# Altium PCB IMX290_module_pcb.PcbDoc
Units mm, origin at the board's own origin, x right, y up, seen from the top; angles counter-clockwise.
Board outline 27 x 27 mm, 6 copper layers (Top Layer, GND_T, PWR, Singal_Int, GND_B, Bottom Layer), stack 0.816 mm thick; 52 components, 35 nets, 341 pads, 255 vias.
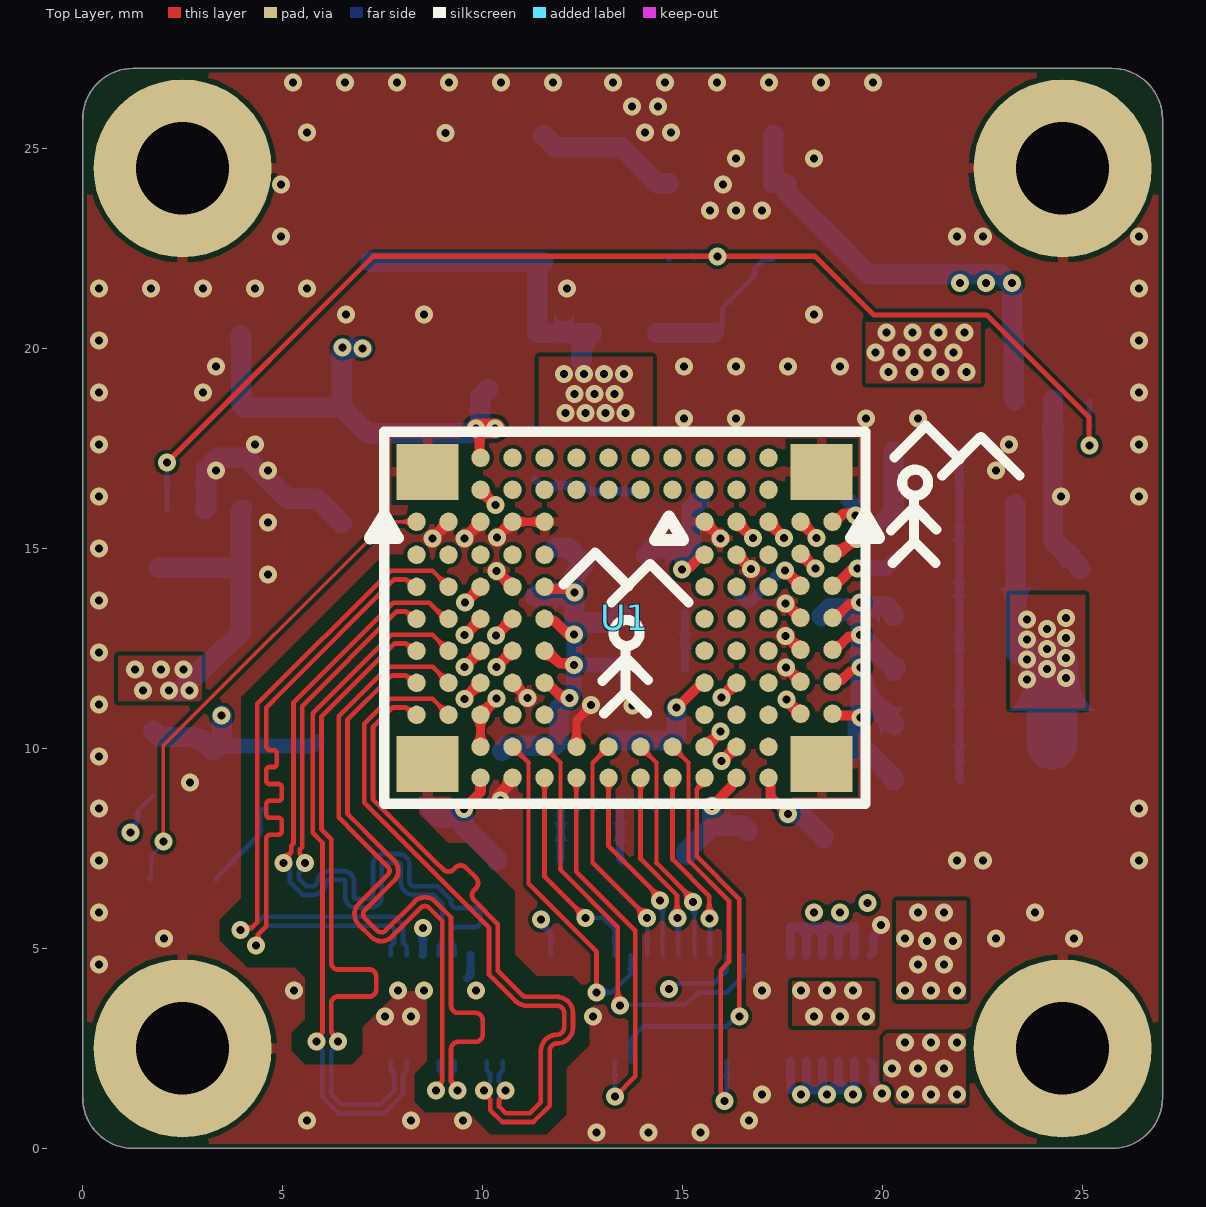
[diagram p0: Top Layer view]
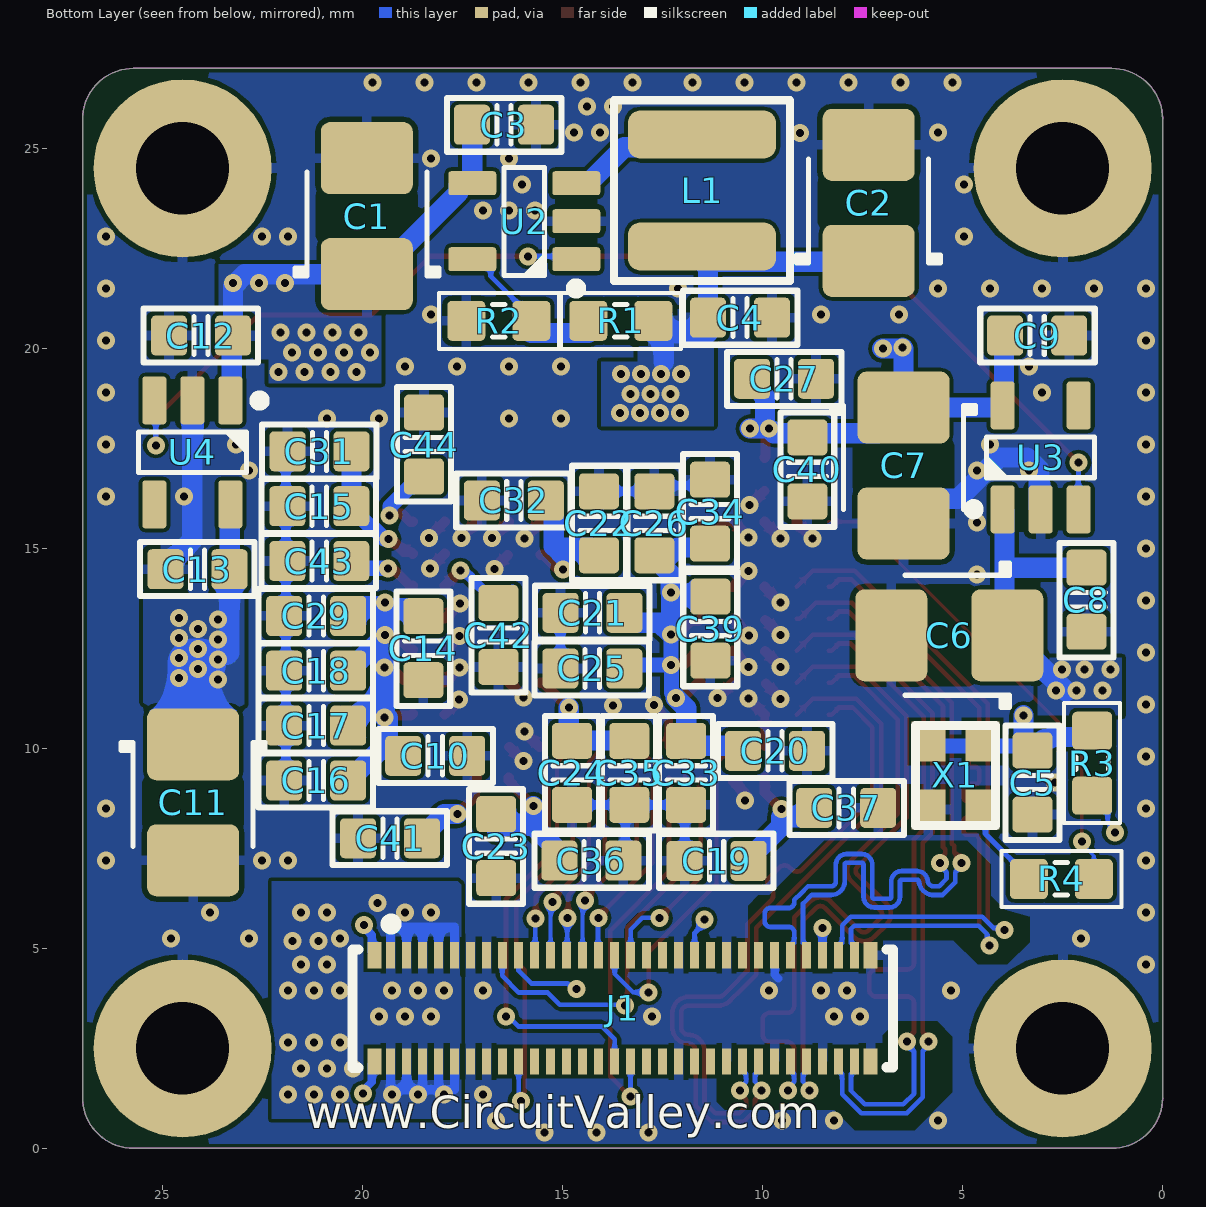
[diagram p1: Bottom Layer view, seen from below]
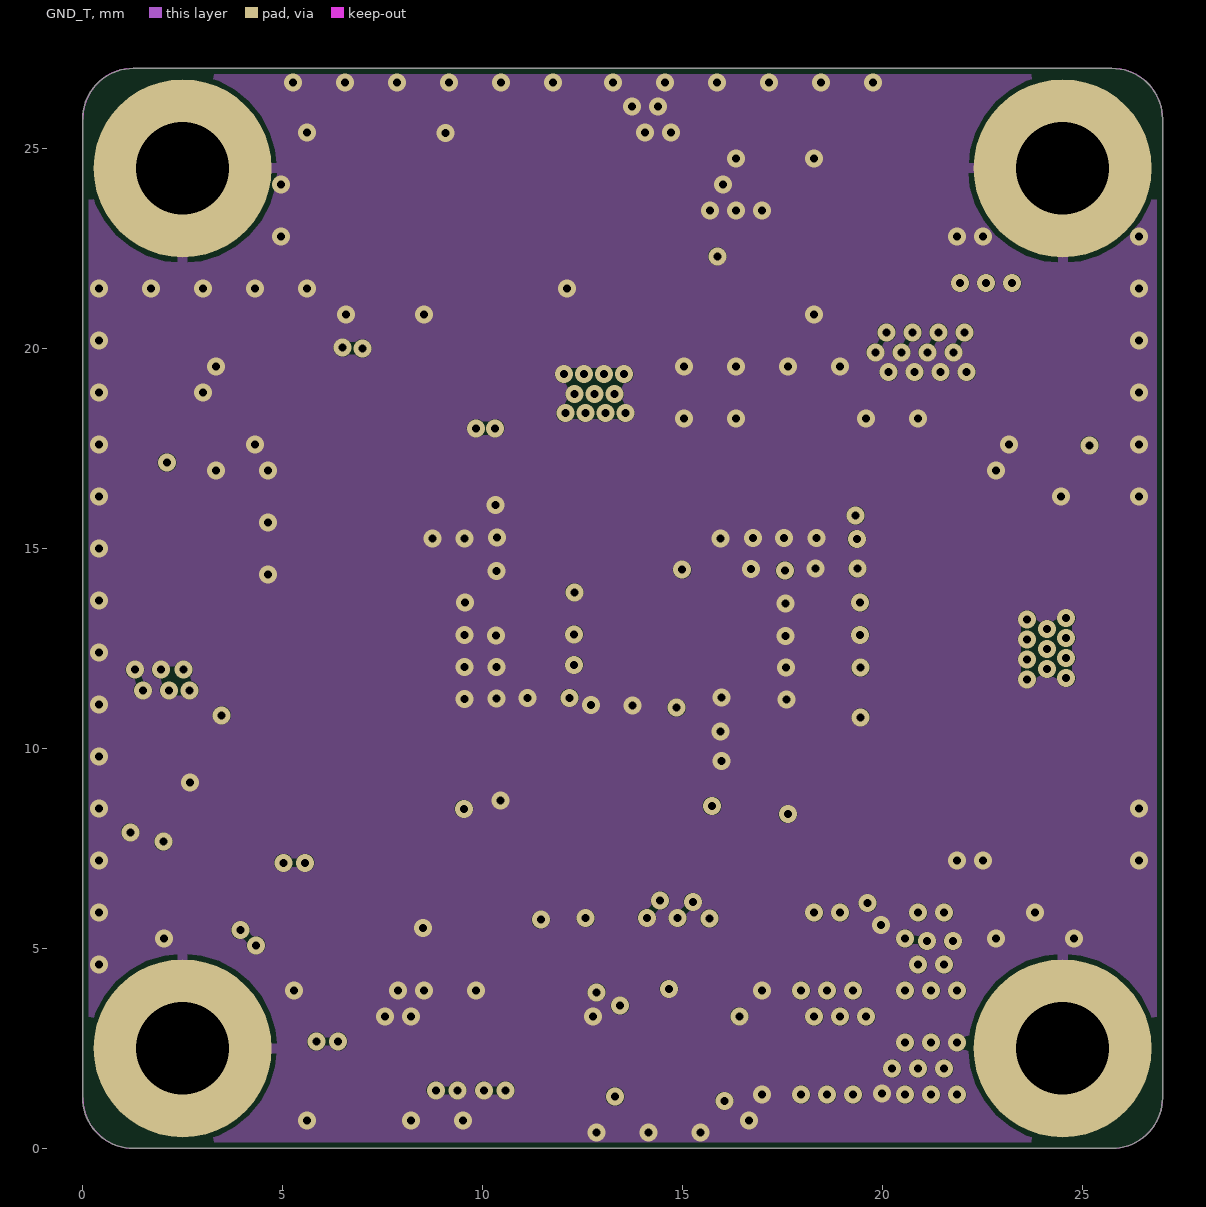
[diagram p2: GND_T]
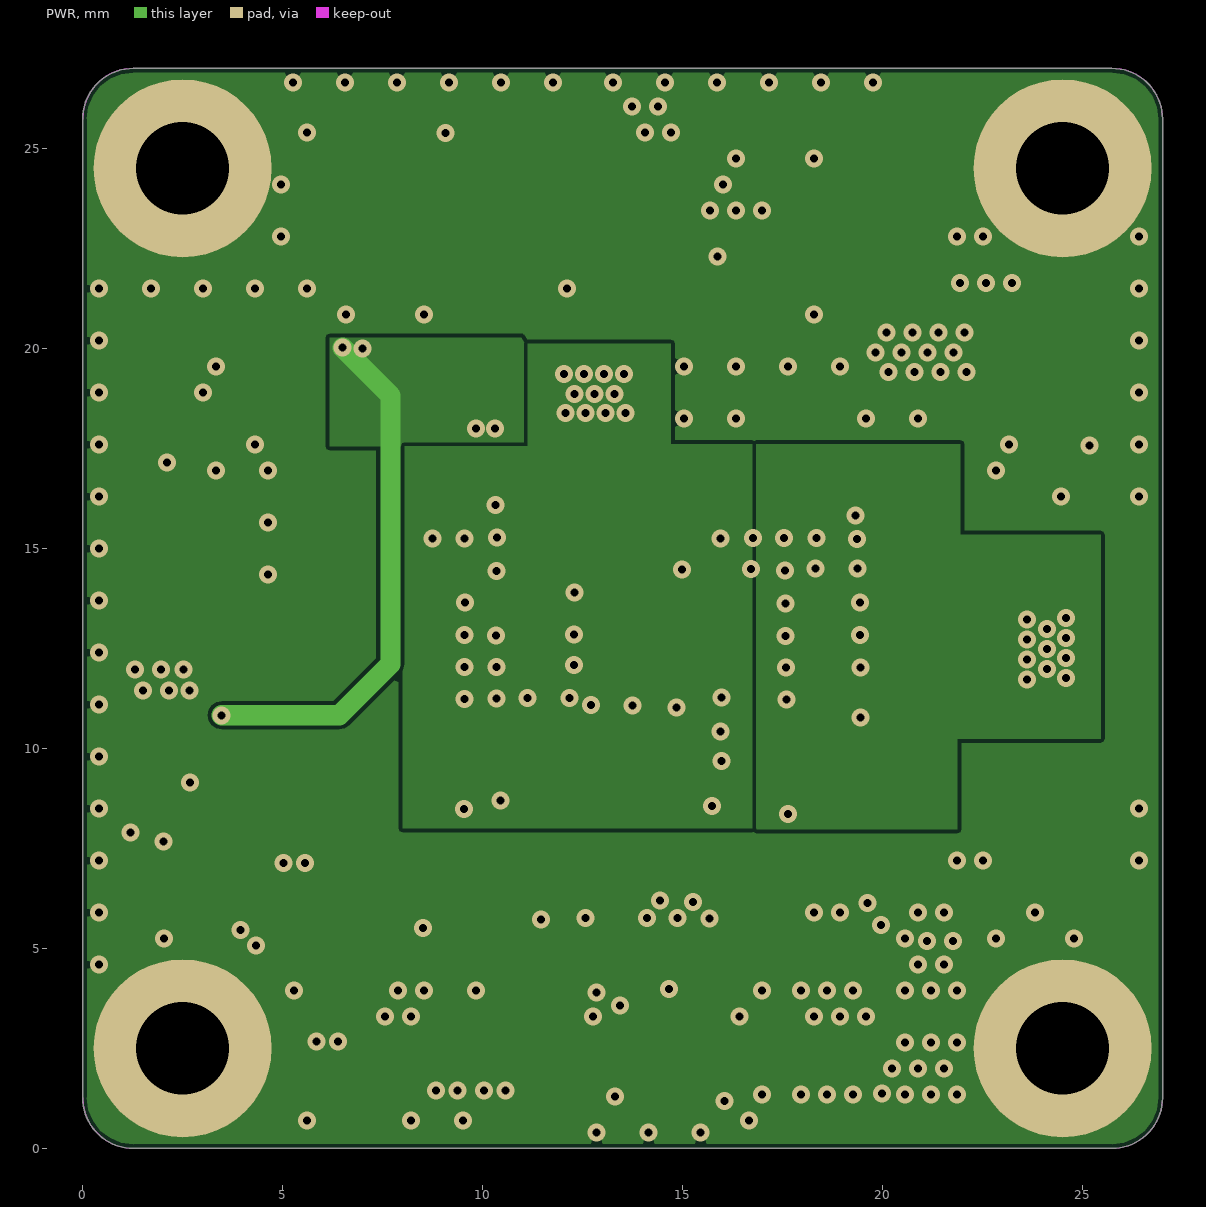
[diagram p3: PWR]
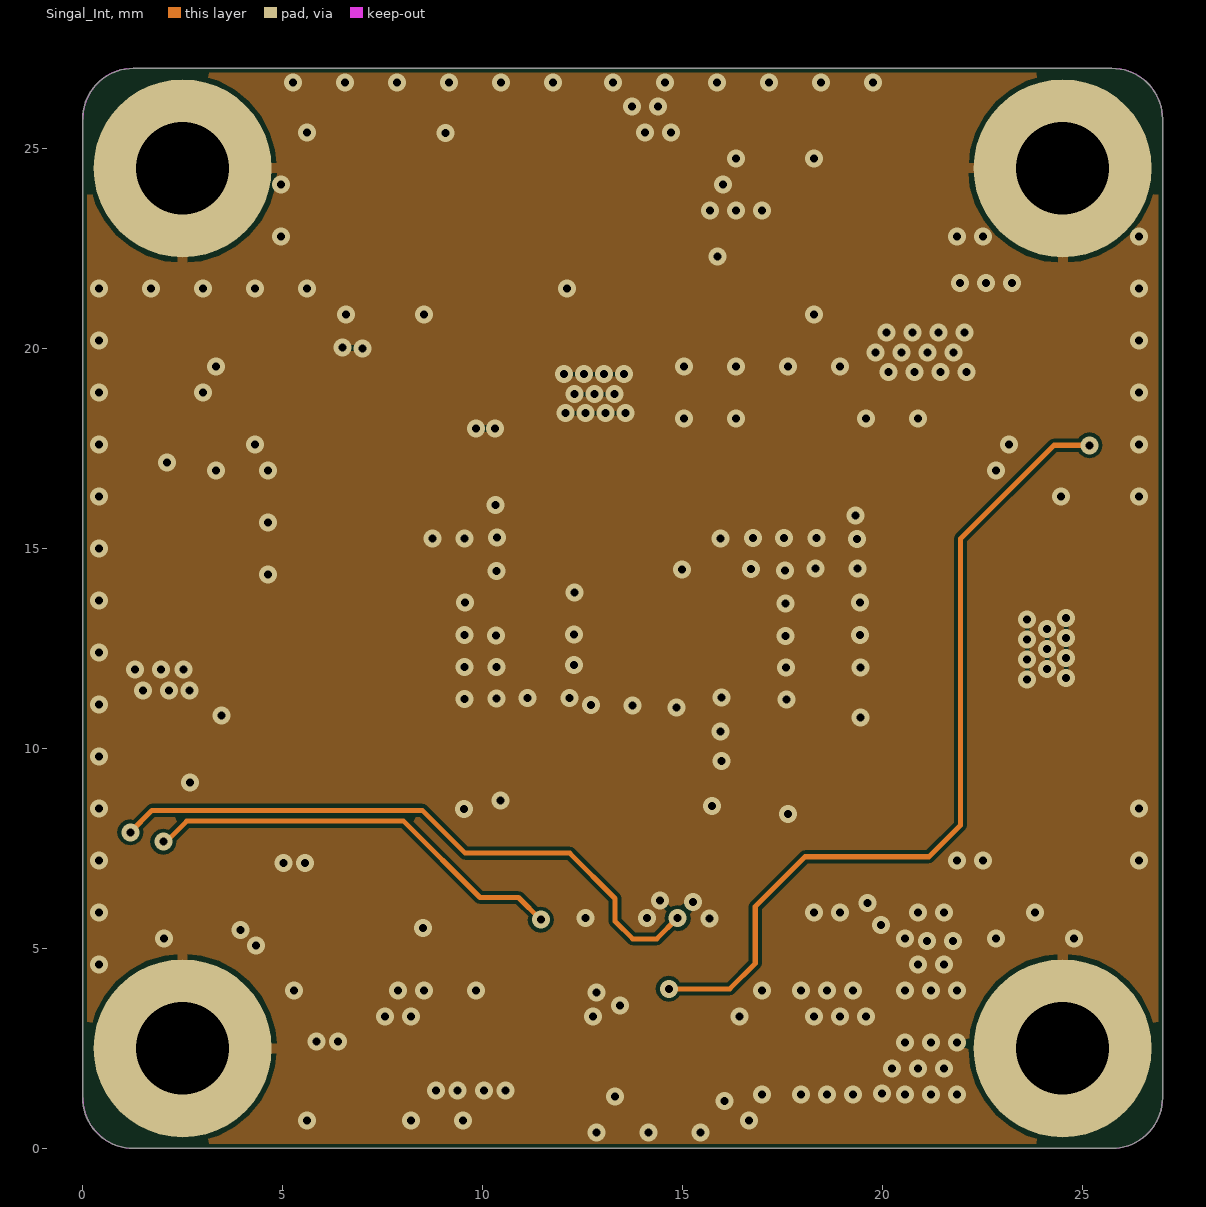
[diagram p4: Singal_Int]
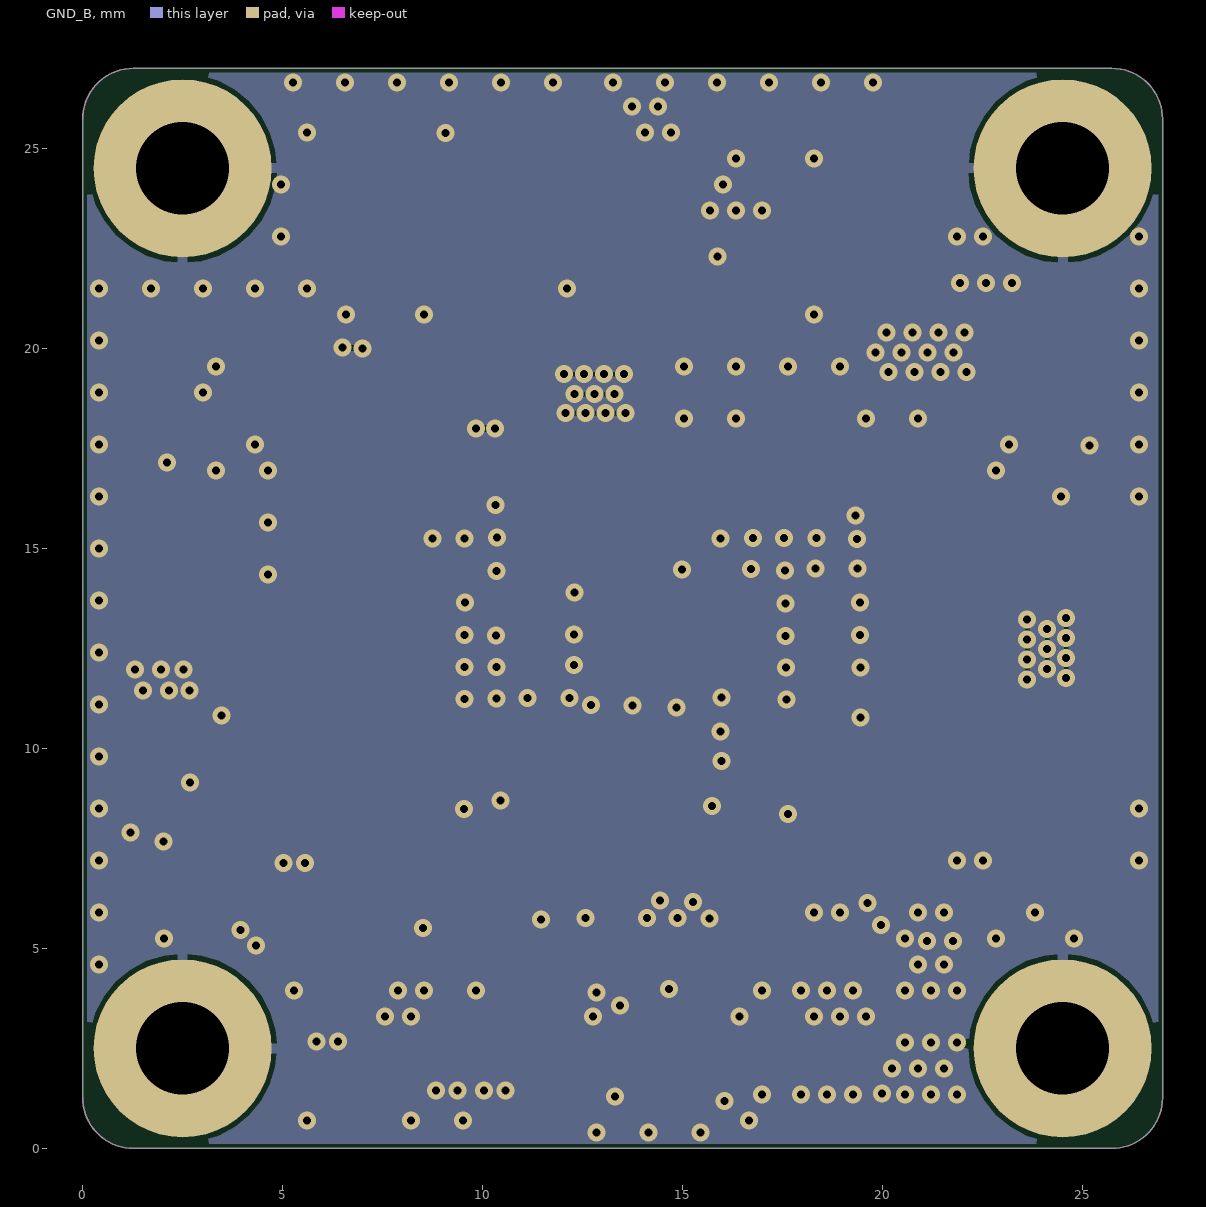
[diagram p5: GND_B]
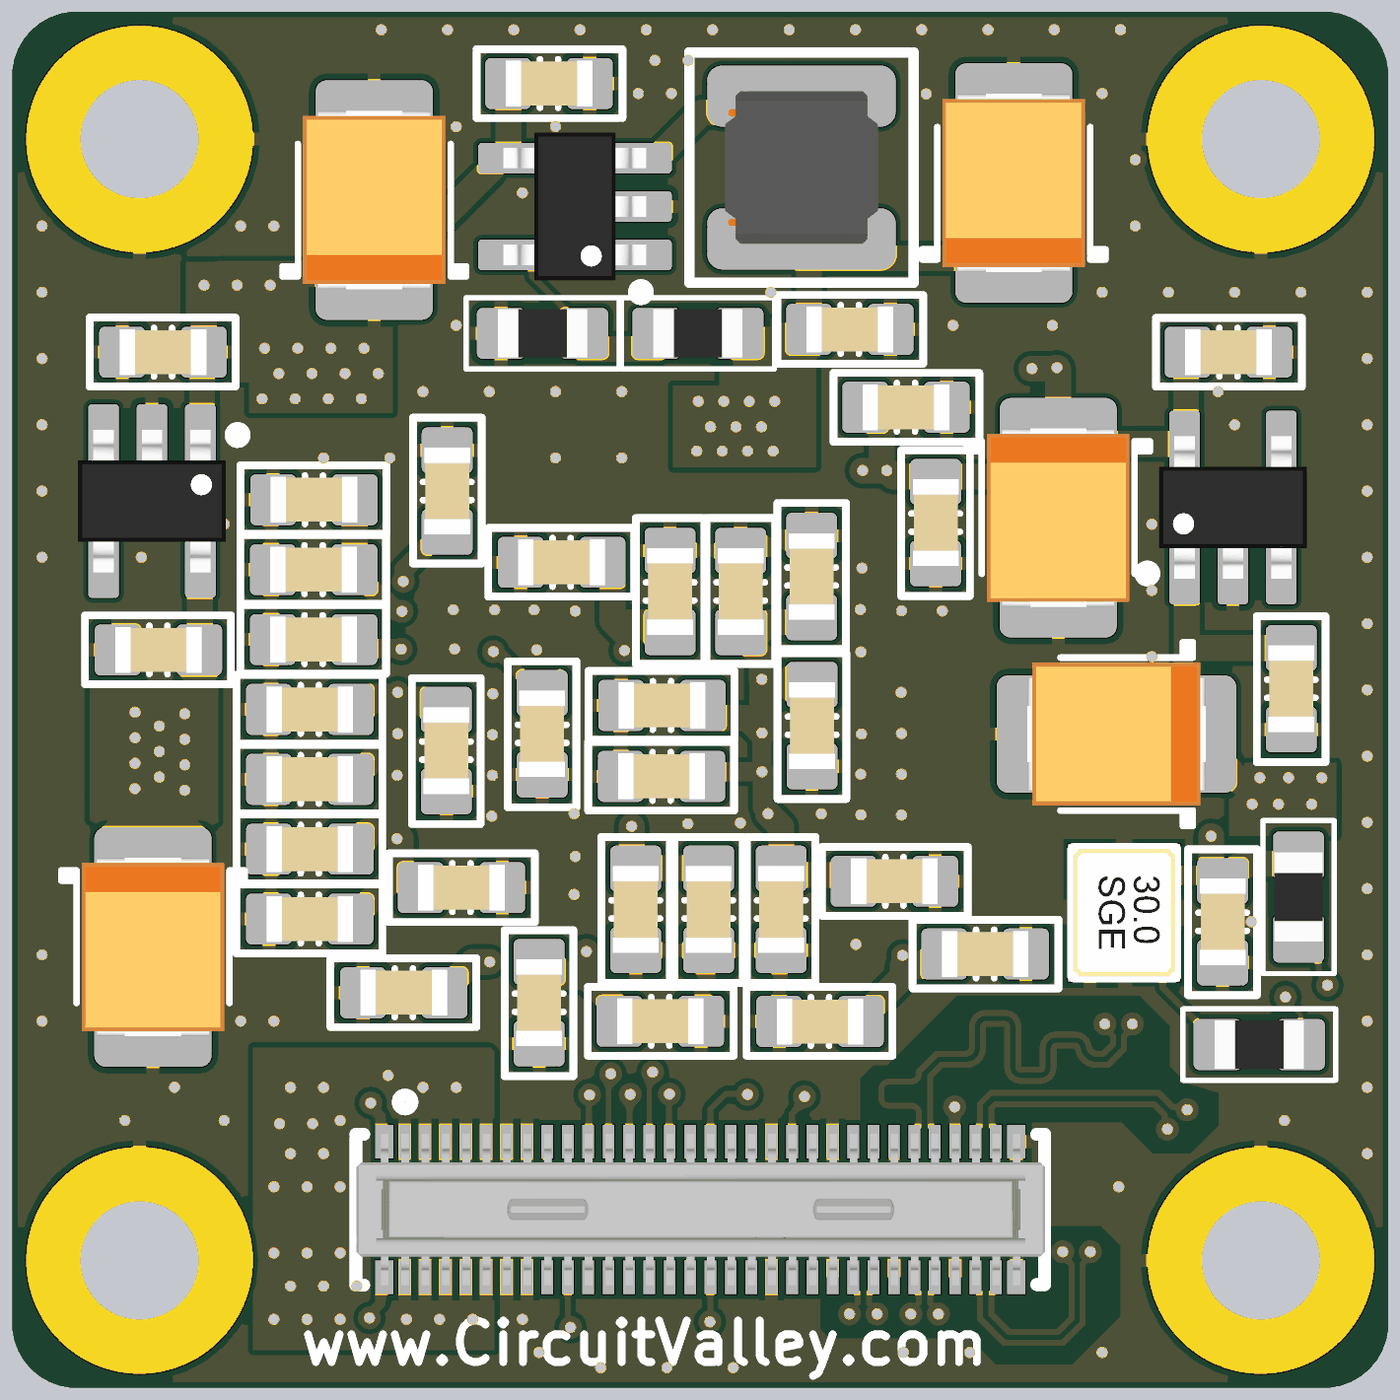
[diagram p6: 3D render of the assembled board from below, using the file's embedded part models]

## Layer stack, top to bottom
Top Solder: solder mask 0.0102, Solder Resist, Dk 3.5
Top Layer: signal copper 0.0356
Dielectric 2: prepreg 0.0711, PP-006, Dk 4.1
GND_T: signal copper 0.035
Dielectric 4: prepreg 0.0711, PP-006, Dk 4.1
PWR: signal copper 0.035
Dielectric 1: dielectric 0.32, FR-4, Dk 4.8
Singal_Int: signal copper 0.035
Dielectric 5: prepreg 0.0711, PP-006, Dk 4.1
GND_B: signal copper 0.035
Dielectric 3: prepreg 0.0711, PP-006, Dk 4.1
Bottom Layer: signal copper 0.0356
Bottom Solder: solder mask 0.0102, Solder Resist, Dk 3.5

## Board outline
0,1.27 0,25.73 cw(c1.27,25.73) 1.27,27 25.73,27 cw(c25.73,25.73) 27,25.73 27,1.27 cw(c25.73,1.27) 25.73,0 1.27,0 cw(c1.27,1.27)

## Design rules (kind name [scope] priority, off if disabled: settings)
Clearance Clearance_GNDT [OnLayer('GND_T')] p1: gap=0.127 ignorepadtopadclearanceinfootprint=FALSE
Clearance Clearance_INT [OnLayer('Signal_INT')] p2: gap=0.127 ignorepadtopadclearanceinfootprint=FALSE
Clearance [All] p3: gap=0.091 ignorepadtopadclearanceinfootprint=FALSE
Clearance Clearance_PWR [OnLayer('PWR')] p4: gap=0.127 ignorepadtopadclearanceinfootprint=FALSE
Clearance Clearance_GNDB [OnLayer('GND_B')] p5: gap=0.127 ignorepadtopadclearanceinfootprint=FALSE
ComponentClearance [All] p1: gap=0.254 collisioncheckmode=3 verticalgap=0 showdistances=FALSE
DiffPairsRouting [All] p1: maxlimit=0.102 minlimit=0.102 mostfreqgap=0.102 toplayer_minwidth=0.089 toplayer_maxwidth=0.254 toplayer_prefwidth=0.117 midlayer1_minwidth=0.117 midlayer1_maxwidth=0.254 midlayer1_prefwidth=0.117 midlayer2_minwidth=0.117 midlayer2_maxwidth=0.254 midlayer2_prefwidth=0.117 midlayer3_minwidth=0.117 midlayer3_maxwidth=0.254 midlayer3_prefwidth=0.117 midlayer4_minwidth=0.117 midlayer4_maxwidth=0.254 midlayer4_prefwidth=0.117 bottomlayer_minwidth=0.102 bottomlayer_maxwidth=0.254 bottomlayer_prefwidth=0.117 maxuncoupledlength=12.7
HoleSize [All] p1: absolutevalues=TRUE maxlimit=5 minlimit=0.025 maxpercent=80.000 minpercent=20.000
MatchedLengths Matched_MIPI_GRP [InNetClass('MIPI')] p1: tolerance=0.127 checknetsindiffpair=FALSE checkdiffpairvsdiffpair=TRUE checkxsignals=TRUE checkothers=TRUE
MatchedLengths Matched_MIPI [InNetClass('MIPI')] p2: tolerance=0.127 checknetsindiffpair=TRUE checkdiffpairvsdiffpair=FALSE checkxsignals=FALSE checkothers=FALSE
MatchedLengths Matched_GPIF_GRP [InNetClass('GPIF')] p3: tolerance=1.27 checknetsindiffpair=FALSE checkdiffpairvsdiffpair=TRUE checkxsignals=TRUE checkothers=TRUE
MatchedLengths Matched_USB3FX_GRP [InNetClass('USB3FX')] p4: tolerance=0.127 checknetsindiffpair=FALSE checkdiffpairvsdiffpair=TRUE checkxsignals=TRUE checkothers=TRUE
MatchedLengths Match_USB3FX [InNetClass('USB3FX')] p5: tolerance=0.102 checknetsindiffpair=TRUE checkdiffpairvsdiffpair=FALSE checkxsignals=FALSE checkothers=FALSE
MatchedLengths Matched_USB3_GRP [InNetClass('USB3')] p6: tolerance=0.254 checknetsindiffpair=FALSE checkdiffpairvsdiffpair=TRUE checkxsignals=TRUE checkothers=TRUE
MatchedLengths Matched_USB2 [InNetClass('USB2')] p7: tolerance=1.016 checknetsindiffpair=TRUE checkdiffpairvsdiffpair=FALSE checkxsignals=FALSE checkothers=FALSE
MatchedLengths Matched_USB3 [InNetClass('USB3')] p8: tolerance=0.102 checknetsindiffpair=TRUE checkdiffpairvsdiffpair=FALSE checkxsignals=FALSE checkothers=FALSE
MinimumSolderMaskSliver [All] p1: minsoldermaskwidth=0.001
PlaneClearance [All] p1: clearance=0.152
PlaneConnect PlaneConnect_1 [All] p1: pad.planeconnectstyle=Relief pad.reliefexpansion=0.508 pad.reliefentries=4 pad.reliefconductorwidth=0.254 pad.reliefairgap=0.127 via.planeconnectstyle=Direct via.reliefexpansion=0.508 via.reliefentries=4 via.reliefconductorwidth=0.254 via.reliefairgap=0.254
PolygonConnect [All] p1: thpad.connectstyle=Relief thpad.reliefconductorwidth=0.254 thpad.reliefentries=4 thpad.polygonreliefangle="90 Angle" thpad.airgapwidth=0.127 smdpad.connectstyle=Relief smdpad.reliefconductorwidth=0.254 smdpad.reliefentries=4 smdpad.polygonreliefangle="90 Angle" smdpad.airgapwidth=0.127 via.connectstyle=Direct via.reliefconductorwidth=0.254 via.reliefentries=4 via.polygonreliefangle="90 Angle" via.airgapwidth=0.254
RoutingVias [All] p1: holewidth=0.2 width=0.45 viastyle="Through Hole" minholewidth=0.2 minwidth=0.45 maxholewidth=6.3 maxwidth=7
SilkToSilkClearance [All] p1: silktosilkclearance=0
SilkToSolderMaskClearance [IsPad] p1: minsilkscreentomaskgap=0 clearancetoexposedcopper=TRUE
SolderMaskExpansion [All] p1: expansion=0.025 istentingtop=FALSE
Width [All] p1: maxlimit=1.27 minlimit=0.089 preferedwidth=0.127 midlayer1_minwidth=0.127 midlayer2_minwidth=0.127 midlayer3_minwidth=0.127 midlayer4_minwidth=0.127 minimp=50.000000 maximp=50.000000 favimp=50.000000
22 further rules are at their usual default settings.

## Classes and differential pairs
net class MIPI: CAM_CLK_N CAM_CLK_P CAM_D1_N CAM_D1_P CAM_D2_N CAM_D2_P CAM_D3_N CAM_D3_P CAM_D4_N CAM_D4_P
differential pair CAM_D4: +CAM_D4_P -CAM_D4_N
differential pair CAM_D3: +CAM_D3_P -CAM_D3_N
differential pair CAM_D2: +CAM_D2_P -CAM_D2_N
differential pair CAM_D1: +CAM_D1_P -CAM_D1_N
differential pair CAM_CLK: +CAM_CLK_P -CAM_CLK_N

## Components (designator, comment, footprint, x,y, rotation, side; value= is the part's Value field where it differs from the comment)
C1 "10µ" CAPMP3528X210N 19.896,23.305 r90 bottom
C2 "10µ" CAPMP3528X210N 7.348,23.637 r90 bottom
C3 "100n" CAPC1608N 16.467,25.591 r0 bottom
C4 "100n" CAPC1608N 10.566,20.768 r0 bottom
C5 "100n" CAPC1608N 3.252,9.145 r90 bottom
C6 "10µ" CAPMP3528X210N 5.334,12.827 r0 bottom
C7 "10µ" CAPMP3528X210N 6.477,17.071 r270 bottom
C8 "100n" CAPC1608N 1.905,13.716 r90 bottom
C9 "100n" CAPC1608N 3.137,20.32 r0 bottom
C10 "4.7uf" CAPC1608N 18.185,9.814 r0 bottom
C11 "10µ" CAPMP3528X210N 24.238,8.65 r270 bottom
C12 "100n" CAPC1608N 24.041,20.32 r180 bottom
C13 "100n" CAPC1608N 24.13,14.478 r180 bottom
C14 "100n" CAPC1608N 18.481,12.503 r90 bottom
C15 "100n" CAPC1608N 21.084,16.053 r180 bottom
C16 "100n" CAPC1608N 21.161,9.198 r180 bottom
C17 "100n" CAPC1608N 21.161,10.569 r180 bottom
C18 "100n" CAPC1608N 21.161,11.94 r180 bottom
C19 "100n" CAPC1608N 11.151,7.188 r180 bottom
C20 "100n" CAPC1608N 9.691,9.938 r0 bottom
C21 "100n" CAPC1608N 14.252,13.388 r180 bottom
C22 "100n" CAPC1608N 14.092,15.625 r270 bottom
C23 "100n" CAPC1608N 16.66,7.556 r90 bottom
C24 "100n" CAPC1608N 14.765,9.388 r90 bottom
C25 "100n" CAPC1608N 14.258,11.997 r180 bottom
C26 "100n" CAPC1608N 12.706,15.625 r270 bottom
C27 "10n" CAPC1608N 9.465,19.239 r0 bottom
C29 "4.7uf" CAPC1608N 21.161,13.311 r180 bottom
C31 "4.7uf" CAPC1608N 21.079,17.423 r180 bottom
C32 "4.7uf" CAPC1608N 16.22,16.196 r180 bottom
C33 "4.7uf" CAPC1608N 11.911,9.388 r90 bottom
C34 "4.7uf" CAPC1608N 11.315,15.918 r270 bottom
C35 "4.7uf" CAPC1608N 13.334,9.388 r90 bottom
C36 "4.7uf" CAPC1608N 14.283,7.192 r0 bottom
C37 "4.7uf" CAPC1608N 7.91,8.512 r0 bottom
C39 "4.7uf" CAPC1608N 11.307,12.993 r90 bottom
C40 "4.7uf" CAPC1608N 8.881,16.975 r90 bottom
C41 "0.22uf" CAPC1608N 19.316,7.751 r180 bottom
C42 "1uf" CAPC1608N 16.601,12.832 r90 bottom
C43 "1uf" CAPC1608N 21.084,14.682 r180 bottom
C44 "1uf" CAPC1608N 18.465,17.594 r270 bottom
J1 "DF40C-60DP-0.4V(51)" DF40C-60DP-0.4V 13.5,3.5 r180 bottom locked
L1 "2u2" TAIYO_NRS4018T2R2MDGJ 11.514,23.943 r270 bottom
R1 "Thick Film" RESC1608N_ZERO 13.546,20.688 r0 bottom value=30K
R2 "Thick Film" RESC1608N_ZERO 16.594,20.688 r0 bottom value=27K
R3 "Thick Film" RESC1608N_ZERO 1.761,9.629 r270 bottom value=0R
R4 "Thick Film" RESC1608N_ZERO 2.533,6.735 r0 bottom value=0R
U1 "IMX290LQR-C" IMX290LQR-C 13.549,13.265 r180 top locked
U2 "AP3417C" SOT23-5 15.959,23.178 r0 bottom
U3 "MIC550x" SOT23-5 3.048,17.272 r90 bottom
U4 "MIC550x" SOT23-5 24.257,17.399 r270 bottom
X1 "DSO221SR" "Active Oscillator 2520" 5.182,9.322 r270 bottom

## Footprints (in the part's own frame and the unit in brackets; to place one, negate y for a bottom-side part, rotate by r counter-clockwise, add the part's x,y. Pads: shape width x height; smd on the part's side, far side on the other; paste and mask are expansions set on the pad)
"Active Oscillator 2520" [mm]
  rect 1x0.85 smd: 1(-0.85,-0.675) 2(0.85,-0.675) 3(0.85,0.675) 4(-0.85,0.675)
  silkscreen extent -1.25,-1 1.25,1, body extent -1.25,-1 1.25,1, height 0.56
CAPC1608N [mm] "Chip Capacitor, Body 1.6x0.8mm, 0603, IPC Medium Density"
  round 0.254 on Mech14: 0(0,0)
  rrect25% 0.9x1 smd: 1(-0.8,0) 2(0.8,0)
  silkscreen extent -1.44,-0.67 1.42,0.68, body extent -0.85,-0.45 0.85,0.45, height 0.89
CAPMP3528X210N [mm] "Molded body capacitor, Body 3.5x2.8mm, 1210, IPC Nominal settings"
  round 0.254 on Mech14: 0(0,0)
  rrect25% 1.8x2.3 smd: 1(-1.45,0) 2(1.45,0)
  Top Layer pour cut-out: -0.508,1.27 0.508,1.27 0.508,-1.27 -0.508,-1.27
  silkscreen extent -1.5,-1.8 1.1,1.8, body extent -1.75,-1.4 1.75,1.4, height 2.1
DF40C-60DP-0.4V [mm] "Hiros 60Pin 0.4mm Connector Used with Camera Sensors"
  rect 0.23x0.66 smd: 1(-5.8,1.33) 2(-5.8,-1.33) 3(-5.4,1.33) 4(-5.4,-1.33) 5(-5,1.33) 6(-5,-1.33) 7(-4.6,1.33) 8(-4.6,-1.33) 9(-4.2,1.33) 10(-4.2,-1.33) 11(-3.8,1.33) 12(-3.8,-1.33) 13(-3.4,1.33) 14(-3.4,-1.33) 15(-3,1.33) 16(-3,-1.33) 17(-2.6,1.33) 18(-2.6,-1.33) 19(-2.2,1.33) 20(-2.2,-1.33) 21(-1.8,1.33) 22(-1.8,-1.33) 23(-1.4,1.33) 24(-1.4,-1.33) 25(-1,1.33) 26(-1,-1.33) 27(-0.6,1.33) 28(-0.6,-1.33) 29(-0.2,1.33) 30(-0.2,-1.33) 31(0.2,1.33) 32(0.2,-1.33) 33(0.6,1.33) 34(0.6,-1.33) 35(1,1.33) 36(1,-1.33) 37(1.4,1.33) 38(1.4,-1.33) 39(1.8,1.33) 40(1.8,-1.33) 41(2.2,1.33) 42(2.2,-1.33) 43(2.6,1.33) 44(2.6,-1.33) 45(3,1.33) 46(3,-1.33) 47(3.4,1.33) 48(3.4,-1.33) 49(3.8,1.33) 50(3.8,-1.33) 51(4.2,1.33) 52(4.2,-1.33) 53(4.6,1.33) 54(4.6,-1.33) 55(5,1.33) 56(5,-1.33) 57(5.4,1.33) 58(5.4,-1.33) 59(5.8,1.33) 60(5.8,-1.33)
  rect 0.35x0.66 smd: S1(-6.2,-1.33) S1(-6.2,1.33) S1(6.2,-1.33) S1(6.2,1.33)
  silkscreen extent -6.76,-1.48 6.76,2.24, body extent -6.75,-1.49 6.77,1.48, height 1.1
IMX290LQR-C [mm] "Sony IMX290LQR Image senor"
  round 0.46 smd: A3(-5.2,-2.4) A4(-5.2,-1.6) A5(-5.2,-0.8) A6(-5.2,0) A7(-5.2,0.8) A8(-5.2,1.6) A9(-5.2,2.4) B3(-4.4,-2.4) B4(-4.4,-1.6) B5(-4.4,-0.8) B6(-4.4,0) B7(-4.4,0.8) B8(-4.4,1.6) B9(-4.4,2.4) C1(-3.6,-4) C2(-3.6,-3.2) C3(-3.6,-2.4) C4(-3.6,-1.574) C5(-3.6,-0.774) C6(-3.6,0.026) C7(-3.6,0.826) C8(-3.6,1.626) C9(-3.6,2.426) C10(-3.6,3.226) C11(-3.6,4) D1(-2.8,-4) D2(-2.8,-3.2) D3(-2.8,-2.4) D4(-2.8,-1.574) D5(-2.8,-0.774) D6(-2.8,0.026) D7(-2.8,0.826) D8(-2.8,1.626) D9(-2.8,2.426) D10(-2.8,3.226) D11(-2.8,4) E1(-2,-4) E2(-2,-3.2) E3(-2,-2.4) E4(-2,-1.574) E5(-2,-0.774) E6(-2,0.026) E7(-2,0.826) E8(-2,1.626) E9(-2,2.426) E10(-2,3.226) E11(-2,4) F1(-1.2,-4) F2(-1.2,-3.2) F10(-1.2,3.226) F11(-1.2,4) G1(-0.4,-4) G2(-0.4,-3.2) G10(-0.4,3.226) G11(-0.4,4) H1(0.4,-4) H2(0.4,-3.2) H10(0.4,3.226) H11(0.4,4) J1(1.2,-4) J2(1.2,-3.2) J10(1.2,3.226) J11(1.2,4) K1(2,-4) K2(2,-3.2) K3(2,-2.4) K4(2,-1.574) K5(2,-0.774) K6(2,0.026) K7(2,0.826) K8(2,1.626) K9(2,2.426) K10(2,3.226) K11(2,4) L1(2.8,-4) L2(2.8,-3.2) L3(2.8,-2.4) L4(2.8,-1.574) L5(2.8,-0.774) L6(2.8,0.026) L7(2.8,0.826) L8(2.8,1.626) L9(2.8,2.426) L10(2.8,3.226) L11(2.8,4) M1(3.6,-4) M2(3.6,-3.2) M3(3.6,-2.4) M4(3.6,-1.574) M5(3.6,-0.774) M6(3.6,0.026) M7(3.6,0.826) M8(3.6,1.626) M9(3.6,2.426) M10(3.6,3.226) M11(3.6,4) N3(4.4,-2.4) N4(4.4,-1.574) N5(4.4,-0.774) N6(4.4,0.026) N7(4.4,0.826) N8(4.4,1.626) N9(4.4,2.426) P3(5.2,-2.4) P4(5.2,-1.574) P5(5.2,-0.774) P6(5.2,0.026) P7(5.2,0.826) P8(5.2,1.626) P9(5.2,2.426)
  rect 1.55x1.4 smd: Q1(-4.925,-3.65) Q2(4.925,-3.65) Q3(4.925,3.65) Q4(-4.925,3.65)
  silkscreen extent -9.87,-4.8 6.37,4.65, body extent -6.01,-4.65 6.01,4.65, height 1.52
RESC1608N_ZERO [mm] "Chip Resistor, Body 1.6x0.8mm, 0603, IPC Medium Density"
  round 0.254 on Mech14: 0(0,0)
  rrect25% 0.95x1 smd: 1(-0.813,0) 2(0.813,0)
  Top Layer pour cut-out: -0.4,0.6 0.4,0.6 0.4,-0.6 -0.4,-0.6
  silkscreen extent -1.5,-0.7 1.5,0.7, body extent -0.87,-0.47 0.88,0.48, height 0.54
SOT23-5 [mm]
  round 0.5 on Mech14: 0(0,0)
  rrect25% 1.2x0.6 smd: 1(-1.3,0.95) 2(-1.3,0) 3(-1.3,-0.95) 4(1.3,-0.95) 5(1.3,0.95)
  silkscreen extent -1.42,-1.35 0.51,1.81, body extent -1.4,-1.45 1.4,1.45, height 1.44
TAIYO_NRS4018T2R2MDGJ [mm] "TAIYO"
  rrect50% 1.2x3.7 smd: 1(-1.4,0) 2(1.4,0)
  silkscreen extent -2.26,-2.2 2.26,2.2, body extent -1.5,-1.5 1.5,1.5, height 1.35

## Part data
C1 C2 C6 C7 C11: library part CAPT_47u_1210_6V3, "Capacitor SMD Tantalum 47uF 20% 6.3V 1210", ESR (Equivalent Series Resistance)="70.0 mOhm", Manufacturer 1="AVX Corporation", Manufacturer Part Number 1=TCJB476M006R0070, Manufacturer Size Code=B, Operating Temperature="-55°C ~ 125°C", Package / Case="1210 (3528 Metric)", Ratings=10V, Supplier Part Number 1=478-3139-1-ND, Tolerance=±20%, Voltage - Rated=6V3, ComponentLink1Description=http://www.avx.com/docs/Catalogs/tcj.pdf, ComponentLink1URL=http://www.avx.com/docs/Catalogs/tcj.pdf, Height - Seated (Max)="0.083\" (2.10mm)", Material=Tantalum, Size / Dimension="0.138\" L x 0.110\" W (3.50mm x 2.80mm)", Supplier 1=Digi-Key, Type=Molded
C3 C4 C5 C8 C9 C10 C12 C13 C14 C15 C16 C17 C18 C19 C20 C21 C22 C23 C24 C25 C26 C27 C29 C31 C32 C33 C34 C35 C36 C37 C39 C40 C41 C42 C43 C44: library part CAPC_10p_0603_NP0_1%_50V, "Capacitor SMD Cer 10pF 5% 50V NP0 0603", Manufacturer 1="Murata Electronics North America", Manufacturer Part Number 1=GRM1885C1H100FA01J, Operating Temperature="-55°C ~ 125°C", Package / Case="0603 (1608 Metric)", Ratings="50V; NP0", Supplier Part Number 1=GRM1885C1H100FA01J-ND, Tolerance=±5%, Part=C0603X104K5RAC, Size / Dimension="0.063\" L x 0.032\" W (1.60mm x 0.81mm)", Supplier 1=Digi-Key, Thickness (Max)="0.035\" (0.90mm)"
J1: library part LSHM-130-xx, "Samtec 0.5mm 60 pin Connector"
L1: library part inductor_smd, PartNumber=NRS4018T2R2MDGJ
R1 R2 R3 R4: library part RES_0R_0603, "Resistor SMD chip 0.0 Ohm 0.1W 0603", Manufacturer 1=Vishay/Dale, Manufacturer Part Number 1=CRCW06030000Z0EA, Package / Case="0603 (1608metric)", Ratings=1/10W, Supplier Part Number 1=541-0.0GCT-ND, Tolerance=±5%, Supplier 1=Digi-Key
U1: "Sony Color Image senosr"
X1: library part Oscillator_2520, "Active Oscillator_2520"

## Free pads (board coordinates)
  round 4.45 hole 2.32: Q5(2.5,24.5) Q6(24.5,24.5) Q7(24.5,2.5) Q8(2.5,2.5)

## Via types
v1: diameter 0.45, hole 0.2, Top Layer to Bottom Layer, tented both sides, 255 vias

## Nets (pads, with @x,y where several pads share a name; then routed paths per layer and width w, separated by ;. In a path a pad name is that pad's centre, name@x,y a point inside that pad or via, vN(x,y) a via of type N, cw(c..) or ccw(c..) an arc to the next point about the centre after c; other vN are vias at no path point)
1V2: C2.1 C4.2 C19.2 C20.2 C21.2 C22.2 C23.2 C24.2 C25.2 C26.2 C32.2 C33.2 C34.2 C35.2 C36.2 C37.2 C39.2 L1.2 R1.1 U1.D11 U1.E4 U1.E8 U1.K5 U1.K6 U1.K7 U1.K8 U1.M11 | length 35.7
  Top Layer w0.254: v1(9.531,8.485) 9.945,8.899 9.945,9.261 U1.M11 ; U1.K8 11.615,11.639 11.99,11.264 v1(12.172,11.264) ; U1.K7 11.615,12.439 11.93,12.124 12.251,12.124 v1(12.288,12.086) ; U1.K6 11.596,13.192 11.787,13.192 v1@12.151,12.827 ; U1.K5 11.596,13.992 12.15,13.992 12.241,13.901 v1(12.294,13.901) ; v1(14.846,11.017) 14.86,11.017 15.482,11.639 U1.E8 ; v1(14.987,14.468) 15.024,14.505 15.149,14.505 15.482,14.839 U1.E4 ; v1(15.734,8.559) 16.226,9.051 16.226,9.075 16.349,9.198 U1.D11
  Bottom Layer w0.381: v1(12.172,11.264) 12.172,11.282 12.278,11.389 12.278,12.076 v1(12.288,12.086) ; v1(12.288,12.847) v1(12.288,12.086) ; C25.2 13.458,12.086 v1(12.288,12.086)
  Bottom Layer w0.508: C2.1@7.196,22.162 11.514,22.162 11.366,22.014 11.366,20.387 11.368,20.385 R1.1@12.471,20.385 ; C37.2 8.71,8.473 8.906,8.277 9.531,8.277 9.531,8.057 10.351,7.238 C19.2 ; C20.2 10.615,10.063 11.786,10.063 C33.2 11.911,11.003 v1(12.172,11.264) ; C39.2 11.34,13.826 12.219,13.826 v1(12.294,13.901) 12.294,14.35 12.545,14.601 12.126,15.021 11.817,15.021 ; v1@12.288,13.864 v1(12.288,12.847) 12.584,13.142 13.256,13.142 13.452,13.338 C21.2 ; 12.471,19.659 12.471,20.384 R1.1@12.733,20.384 ; C35.2 13.342,10.195 14.757,10.195 14.846,10.285 v1(14.846,11.017) ; C22.2 14.288,15.021 15.189,15.021 ; 14.987,14.819 15.189,15.021 ; C36.2@15.104,7.343 15.083,7.363 15.083,7.413 15.734,8.064 ; C32.2 15.224,16 15.224,15.056 15.189,15.021 ; v1(15.734,8.559) 15.734,8.064 ; C23.2@16.635,7.924 16.495,8.064 15.734,8.064
  other v1: 12.07,18.378 12.57,18.378 13.07,18.378 13.57,18.378 12.299,18.855 12.799,18.855 13.299,18.855 12.038,19.355 12.538,19.355 13.038,19.355 13.538,19.355
1V8: C5.2 C7.1 C9.2 C27.2 C40.2 R3.1 U1.M1 U3.5 X1.1 X1.4 | length 30.9
  Top Layer w0.254: v1@9.926,17.817 9.926,17.288 U1.M1
  Top Layer w0.508: v1(9.84,17.998) v1(10.314,17.998)
  PWR w0.508: v1(3.478,10.824) 6.414,10.824 7.695,12.105 7.695,18.823 v1(6.502,20.015)
  Bottom Layer w0.381: C5.2 3.34,10.033 3.365,10.058 4.507,10.058 5.743,10.058 X1.1
  Bottom Layer w0.508: R3.1 1.921,10.282 2.772,10.282 2.821,10.233 2.963,10.233 C5.2 3.282,9.945 3.478,10.141 v1(3.478,10.824) ; C9.2 3.968,20.289 3.968,18.603 U3.5 3.998,18.567 4.044,18.521 C7.1 ; v1(6.502,20.015) 6.477,19.99 C7.1 ; v1@6.533,19.994 v1@7.007,19.994 ; v1(9.84,17.998) 9.722,17.88 8.659,17.88 8.654,17.875 7.123,17.875 C7.1 ; v1@9.845,17.995 v1@10.319,17.995 ; v1@9.942,18.19 9.942,18.789 C27.2@10.138,18.985
  other v1: 6.993,19.997
2V9: C10.2 C11.1 C13.2 C14.2 C15.2 C16.2 C17.2 C18.2 C29.2 C31.2 U1.A4 U1.A6 U1.A7 U1.A8 U1.A9 U4.5 | length 21.7
  Top Layer w0.254: U1.A9 18.796,10.817 19.352,10.817 19.397,10.773 v1(19.45,10.773) ; U1.A8 18.796,11.712 18.979,11.712 19.188,11.92 ; U1.A7 18.815,12.465 19.148,12.797 v1@19.322,12.797 ; U1.A6 18.815,13.265 19.159,13.609 19.322,13.609 v1@19.36,13.646 ; U1.A4 18.796,14.912 18.973,14.912 19.198,15.136 19.202,15.136 19.3,15.234 v1(19.353,15.234)
  Bottom Layer w0.381: v1(19.353,15.234) 19.457,15.234 19.717,15.494 19.771,15.494 C15.2@20.279,16.003
  Bottom Layer w0.508: C14.2 18.677,13.499 19.392,13.499 v1@19.45,13.557 ; v1@19.373,10.773 19.373,10.038 19.298,9.963 19.564,9.963 20.279,9.248 C16.2@20.279,9.198 ; v1(19.45,10.773) 19.45,11.454 ; C18.2@20.279,11.94 20.279,11.99 v1@19.45,12.819 ; C29.2@20.279,13.311 20.279,13.361 20.083,13.557 v1@19.45,13.557 ; C15.2@20.279,16.003 C31.2 ; C17.2@20.284,10.569 20.284,10.619 19.45,11.454 ; C18.2@20.32,11.99 C18.2@20.32,12.04 ; U4.5 23.318,16.088 23.318,14.49 C13.2 23.33,12.392 23.39,12.332 ; 19.45,11.454 v1@19.45,12.819 ; v1@19.45,12.819 v1@19.45,13.557
  Bottom Layer w1.27: v1@24.054,12.116 24.238,12.116 C11.1
  other v1: 23.613,11.723 24.59,11.755 24.113,11.984 19.448,12.018 23.613,12.223 24.59,12.255 24.113,12.484 23.613,12.723 24.59,12.755 19.436,12.835 24.113,12.984 23.613,13.223 24.59,13.255 19.436,13.646
3V3: C1.1 C3.2 C6.1 C8.2 C12.2 J1.1 J1.2 J1.3 J1.4 J1.5 J1.6 J1.7 J1.8 J1.9 J1.10 U2.4 U3.1 U4.1 | length 28.7
  Bottom Layer w0.229: J1.10 17.7,1.471 v1@18.1,1.471 ; J1.9 17.7,5.529 18.1,5.529 ; J1.8 v1@18.1,1.471 ; J1.7 18.1,5.529 ; J1.6 v1@18.5,1.471 ; J1.5 18.5,5.529 ; J1.4 18.9,1.471 ; J1.3 18.9,5.529 ; J1.2 19.3,1.471 18.9,1.471 ; J1.1 19.3,5.529 18.9,5.529 ; v1@18.1,1.471 v1@18.5,1.471 ; 18.1,5.529 18.5,5.529 ; v1@18.5,1.471 18.9,1.471 ; 18.5,5.529 18.9,5.529
  Bottom Layer w0.508: C8.2 3.863,14.516 3.952,14.605 ; 2.413,11.43 2.572,11.581 2.784,11.782 C6.1 3.952,12.895 3.952,14.605 ; U3.1 3.952,15.926 3.952,14.605 ; U2.4 17.559,24.128 17.605,24.082 17.605,23.896 19,22.501 19.646,21.855 22.943,21.855 23.241,21.557 C12.2 23.274,20.287 23.274,18.732 U4.1 ; U2.4@17.263,24.128 17.263,25.333 C3.2@17.267,25.337
  other v1: 17.965,1.345 18.615,1.345 19.265,1.345 20.565,1.345 21.215,1.345 21.865,1.345 20.24,1.995 20.89,1.995 21.54,1.995 20.565,2.645 21.215,2.645 21.865,2.645 18.29,3.295 18.94,3.295 19.59,3.295 17.965,3.945 18.615,3.945 19.265,3.945 20.565,3.945 21.215,3.945 21.865,3.945 20.89,4.595 21.54,4.595 21.104,5.181 21.754,5.181 20.565,5.245 18.29,5.895 18.94,5.895 20.89,5.895 21.54,5.895 19.624,6.13 1.505,11.451 2.155,11.451 2.671,11.451 1.306,11.969 1.956,11.969 2.521,11.969 20.148,19.406 20.798,19.406 21.448,19.406 22.098,19.406 19.818,19.901 20.468,19.901 21.118,19.901 21.768,19.901 20.097,20.396 20.747,20.396 21.397,20.396 22.047,20.396 21.936,21.633 22.586,21.633 23.236,21.633
CAM_CLK: J1.39 R4.1 U1.P3 | length 23.8
  Top Layer w0.089: v1@2.019,7.616 2.019,10.071 7.613,15.665 U1.P3
  Singal_Int w0.127: v1@2.139,7.715 2.604,8.179 8.026,8.179 9.931,6.274 10.897,6.274 v1(11.455,5.715)
  Bottom Layer w0.089: R4.1@1.642,6.787 1.72,6.709 1.72,7.317 v1@2.019,7.616
  Bottom Layer w0.127: v1(11.455,5.715) 11.455,5.628 11.7,5.383 J1.39
  other v1: 2.019,7.667
CAM_CLK_N: J1.60 U1.P7 | length 17.4
  Top Layer w0.117: v1@6.375,2.667 6.375,2.742 6.225,2.892 6.215,2.902 6.215,3.627 cw(c6.384,3.627) 6.384,3.796 7.169,3.796 ccw(c7.169,3.965) 7.338,3.965 7.338,4.303 ccw(c7.169,4.303) 7.169,4.472 6.384,4.472 cw(c6.384,4.641) 6.215,4.641 6.215,5.317 6.215,7.733 5.971,7.977 5.971,10.787 7.806,12.622 8.089,12.622 8.272,12.439 U1.P7
  Bottom Layer w0.117: v1@6.375,2.667 6.375,2.581 6.215,2.421 6.215,1.366 6.483,1.099 7.446,1.099 7.791,1.443 7.791,1.864 7.7,1.955 J1.60
  other v1: 6.389,2.67
CAM_CLK_P: J1.58 U1.N7 | length 17.4
  Top Layer w0.112: 7.715,12.841 8.746,12.841
  Top Layer w0.117: v1@5.836,2.667 5.836,2.742 5.996,2.902 5.996,7.642 5.752,7.886 5.752,10.878 7.715,12.841 ; 8.746,12.841 U1.N7
  Bottom Layer w0.117: v1@5.836,2.667 5.836,2.595 5.996,2.435 5.996,1.275 6.392,0.88 7.537,0.88 8.009,1.352 8.009,1.864 8.1,1.955 J1.58
  other v1: 5.848,2.67
CAM_D1_N: J1.51 U1.P6 | length 17.4
  Top Layer w0.117: v1(5.564,7.139) 5.564,7.229 5.431,7.361 5.431,7.471 5.49,7.53 5.49,11.053 7.858,13.422 8.089,13.422 8.272,13.239 U1.P6
  Bottom Layer w0.117: v1(5.564,7.139) 5.564,7.064 5.404,6.904 5.404,6.738 5.589,6.553 5.748,6.553 ccw(c5.719,6.709) 5.874,6.678 cw(c6.14,6.667) 6.14,6.933 6.519,6.933 cw(c6.519,6.667) 6.785,6.667 6.785,6.287 ccw(c6.832,6.287) 6.832,6.239 7.211,6.239 ccw(c7.211,6.287) 7.258,6.287 7.258,7.091 cw(c7.524,7.091) 7.524,7.357 7.903,7.357 cw(c7.903,7.091) 8.169,7.091 8.169,6.671 ccw(c8.286,6.671) 8.286,6.553 8.866,6.553 9.038,6.381 9.209,6.209 9.209,6.151 ccw(c9.351,6.151) 9.351,6.009 9.807,6.009 cw(c9.807,5.867) 9.949,5.867 9.949,5.678 cw(c9.807,5.678) 9.807,5.536 9.351,5.536 ccw(c9.351,5.394) 9.209,5.394 9.209,5.136 9.3,5.045 9.3,4.938 J1.51
CAM_D1_P: J1.53 U1.N6 | length 17.5
  Top Layer w0.112: 7.768,13.641 8.667,13.641
  Top Layer w0.117: v1@5.025,7.139 5.025,7.214 5.212,7.402 5.212,7.562 5.271,7.62 5.271,11.144 7.768,13.641 ; 8.667,13.641 9.069,13.239 U1.N6
  Bottom Layer w0.117: v1@5.025,7.139 5.025,7.064 5.185,6.904 5.185,6.647 5.498,6.334 5.589,6.334 5.756,6.334 ccw(c5.757,6.444) 5.771,6.335 ccw(c5.719,6.709) 6.092,6.65 ccw(c5.984,6.667) 6.093,6.667 ; 6.093,6.667 cw(c6.14,6.667) 6.14,6.714 6.519,6.714 cw(c6.519,6.667) 6.566,6.667 6.566,6.287 ccw(c6.832,6.287) 6.832,6.021 7.211,6.021 ccw(c7.211,6.287) 7.477,6.287 7.477,7.091 cw(c7.524,7.091) 7.524,7.138 7.903,7.138 cw(c7.903,7.091) 7.95,7.091 7.95,6.671 ccw(c8.286,6.671) 8.286,6.334 8.775,6.334 8.991,6.119 8.991,5.631 8.991,5.136 8.9,5.045 J1.53
  other v1: 5.022,7.139
CAM_D2_N: J1.52 U1.P8 | length 17.4
  Top Layer w0.117: 7.056,5.956 ccw(c7.159,5.853) 7.056,5.75 7.365,5.442 ccw(c7.467,5.545) 7.57,5.442 ; 7.057,5.956 7.784,6.683 ccw(c7.526,6.942) 7.816,7.162 7.816,7.167 7.785,7.199 ccw(c7.526,6.942) 7.784,7.2 7.083,7.9 6.996,7.987 6.621,8.362 6.621,10.715 7.727,11.821 8.089,11.821 8.271,11.639 U1.P8 ; 7.571,5.442 8.298,6.169 cw(c8.556,5.912) 8.777,6.202 8.781,6.202 9.209,5.774 9.209,4.891 9.209,3.861 9.209,3.57 ccw(c9.391,3.57) 9.391,3.388 9.818,3.388 cw(c9.818,3.206) 10,3.206 10,2.843 cw(c9.818,2.843) 9.818,2.661 9.391,2.661 ccw(c9.391,2.48) 9.209,2.48 9.209,1.694 9.209,1.683 9.369,1.523 v1(9.369,1.448)
  Bottom Layer w0.117: J1.52 9.3,1.955 9.209,1.864 9.209,1.664 9.369,1.504 v1(9.369,1.448)
CAM_D2_P: J1.54 U1.N8 | length 17.4
  Top Layer w0.112: 7.637,12.04 8.747,12.04
  Top Layer w0.117: 7.629,6.838 6.902,6.111 ccw(c7.159,5.853) 6.902,5.595 7.209,5.288 ccw(c7.467,5.545) 7.725,5.287 8.452,6.014 ; 7.629,6.838 ccw(c7.526,6.942) 7.629,7.045 6.928,7.745 6.841,7.832 6.402,8.272 6.402,10.805 7.637,12.04 ; 8.453,6.015 cw(c8.556,5.912) 8.659,6.014 8.991,5.683 8.991,4.673 8.991,1.683 8.831,1.523 v1@8.831,1.448 ; 8.747,12.04 U1.N8
  Bottom Layer w0.117: v1@8.831,1.448 8.831,1.504 8.991,1.664 8.991,1.864 8.9,1.955 J1.54
  other v1: 8.828,1.448
CAM_D3_N: J1.59 U1.P5 | length 17.4
  Top Layer w0.117: v1(4.333,5.075) 4.386,5.128 4.386,5.355 4.588,5.556 4.588,7.725 cw(c4.705,7.725) 4.705,7.843 4.894,7.843 ccw(c4.894,7.927) 4.978,7.927 4.978,8.181 ccw(c4.894,8.181) 4.894,8.265 4.672,8.265 cw(c4.672,8.349) 4.588,8.349 4.588,8.603 cw(c4.672,8.603) 4.672,8.687 4.894,8.687 ccw(c4.894,8.772) 4.978,8.772 4.978,9.025 ccw(c4.894,9.025) 4.894,9.109 4.672,9.109 cw(c4.672,9.194) 4.588,9.194 4.588,9.447 cw(c4.672,9.447) 4.672,9.531 4.77,9.531 ccw(c4.77,9.616) 4.854,9.616 4.854,9.869 ccw(c4.77,9.869) 4.77,9.954 4.705,9.954 cw(c4.705,10.071) 4.588,10.071 4.588,11.02 4.972,11.405 7.79,14.222 8.089,14.222 8.272,14.039 U1.P5
  Bottom Layer w0.117: v1(4.333,5.075) 4.387,5.129 4.387,5.354 4.6,5.568 7.709,5.568 7.791,5.486 7.791,5.136 7.7,5.045 J1.59
CAM_D3_P: J1.57 U1.N5 | length 17.4
  Top Layer w0.112: 7.699,14.441 8.746,14.441
  Top Layer w0.117: v1@3.952,5.456 4.005,5.51 4.232,5.51 4.369,5.647 4.369,11.111 7.699,14.441 ; 8.746,14.441 U1.N5
  Bottom Layer w0.117: v1@3.952,5.456 4.005,5.509 4.232,5.509 4.51,5.787 7.8,5.787 8.009,5.577 8.009,5.136 8.1,5.045 J1.57
  other v1: 3.947,5.456
CAM_D4_N: J1.48 U1.P9 | length 17.5
  Top Layer w0.117: U1.P9 8.272,10.839 8.089,11.022 7.753,11.022 7.257,10.526 7.257,8.73 8.818,7.169 9.015,6.972 ccw(c9.143,7.1) 9.272,6.972 9.321,7.021 cw(c9.449,6.893) 9.578,7.021 9.835,6.764 cw(c9.706,6.636) 9.835,6.507 9.786,6.458 ccw(c9.914,6.329) 9.786,6.201 10.379,5.608 10.379,5.426 10.379,4.434 10.822,3.991 10.973,3.84 ccw(c11.102,3.968) 11.102,3.786 11.856,3.786 cw(c11.856,3.386) 12.257,3.386 12.257,3.022 cw(c11.856,3.022) 11.856,2.622 ccw(c11.856,2.44) 11.674,2.44 11.674,1.226 11.674,1.063 11.27,0.658 10.49,0.658 10.191,0.957 10.191,1.214 10.031,1.374 v1(10.031,1.449)
  Bottom Layer w0.117: v1(10.031,1.449) 10.031,1.504 10.191,1.664 10.191,1.864 10.1,1.955 J1.48
CAM_D4_P: J1.46 U1.N9 | length 17.5
  Top Layer w0.112: 7.663,11.241 8.746,11.241
  Top Layer w0.117: 7.663,11.241 7.038,10.616 7.038,8.639 10.16,5.517 10.16,4.343 10.513,3.991 10.818,3.686 ccw(c11.102,3.968) 11.102,3.567 11.856,3.567 cw(c11.856,3.386) 12.038,3.386 12.038,3.022 cw(c11.856,3.022) 11.856,2.84 ccw(c11.856,2.44) 11.455,2.44 11.455,1.226 11.455,1.153 11.179,0.877 10.58,0.877 10.409,1.048 10.409,1.214 10.569,1.374 v1@10.569,1.449 ; 8.746,11.241 U1.N9
  Bottom Layer w0.117: J1.46 10.5,1.955 10.409,1.864 10.409,1.664 10.569,1.504 v1@10.569,1.449
  other v1: 10.572,1.449
ENABLE: J1.17 U2.1 U3.3 U4.3 | length 54.3
  Top Layer w0.127: v1(2.108,17.145) 7.264,22.301 v1(15.869,22.301) 18.31,22.301 19.774,20.837 22.597,20.837 25.157,18.277 25.157,17.591 v1(25.171,17.577)
  Singal_Int w0.127: v1(14.656,3.989) 14.657,3.988 16.18,3.988 16.815,4.623 16.815,6.045 18.059,7.29 21.158,7.29 21.946,8.077 21.946,15.24 24.282,17.577 v1(25.171,17.577)
  Bottom Layer w0.127: U3.3 2.108,15.982 v1(2.108,17.145) ; v1(14.656,3.989) 14.743,3.989 14.879,4.125 15.783,4.125 16.1,4.441 J1.17 ; U2.1 14.733,22.301 v1(15.869,22.301) ; v1(25.171,17.577) 25.171,18.663 U4.3
GND: C1.2 C2.2 C3.1 C4.1 C5.1 C6.2 C7.2 C8.1 C9.1 C10.1 C11.2 C12.1 C13.1 C14.1 C15.1 C16.1 C17.1 C18.1 C19.1 C20.1 C21.1 C22.1 C23.1 C24.1 C25.1 C26.1 C27.1 C29.1 C31.1 C32.1 C33.1 C34.1 C35.1 C36.1 C37.1 C39.1 C40.1 C41.1 C42.1 C43.1 C44.1 J1.11 J1.12 J1.13 J1.14 J1.37 J1.38 J1.43 J1.44 J1.49 J1.50 J1.55 J1.56 J1.S1 pad.Q5 pad.Q6 pad.Q7 pad.Q8 R2.2 U1.B3 U1.B4 U1.B6 U1.B7 U1.B8 U1.B9 U1.C3 U1.D3 U1.D4 U1.D8 U1.D10 U1.E3 U1.E10 U1.J10 U1.K3 U1.L3 U1.L5 U1.L6 U1.L7 U1.L8 U1.L11 U1.M2 U1.M3 U1.M5 U1.M6 U1.M7 U1.M8 U1.M9 U1.M10 U1.N3 U1.Q1 U1.Q2 U1.Q3 U1.Q4 U2.2 U3.2 U4.2 X1.2 | length 48.7
  Top Layer w0.203: U1.M10 U1.M9 ; U1.L3@10.727,15.654 10.738,15.665 U1.L3 U1.K3 ; U1.J10 12.349,10.695 12.71,11.056 v1@12.71,11.083
  Top Layer w0.254: v1@8.749,15.236 8.749,15.25 9.149,15.65 U1.N3 ; v1@9.546,13.639 9.546,13.632 9.552,13.627 9.949,14.024 U1.M5 ; v1@9.549,15.236 9.549,15.25 9.949,15.65 U1.M3 ; v1@9.55,11.253 U1.M8@9.92,11.623 ; v1@9.568,12.057 U1.M7@9.937,12.426 ; v1@9.568,12.843 U1.M6@9.937,13.212 ; U1.M9@9.95,10.839 v1@10.35,11.239 ; U1.M2@9.957,16.435 v1@10.326,16.066 ; v1@10.338,12.827 U1.L6 ; v1@10.349,14.44 U1.L5@10.749,14.04 ; v1(10.353,12.039) 10.353,12.041 U1.L7 U1.L7 ; v1@10.358,15.285 U1.L3@10.727,15.654 ; v1@10.367,8.803 U1.L11@10.736,9.173 ; U1.L8@10.749,11.637 v1@11.149,11.237 ; U1.E3 15.549,15.654 15.951,15.251 v1(15.951,15.24) ; U1.E10@15.582,10.041 v1@15.951,10.41 ; v1@15.958,11.259 U1.D8@16.327,11.628 ; v1@15.964,9.667 U1.D10@16.333,10.036 ; U1.D3 16.349,15.661 16.76,15.25 v1@16.76,15.247 ; U1.D4@16.371,14.831 v1@16.74,14.461 ; U1.C3 17.149,15.65 v1(17.534,15.265) v1@17.534,15.25 ; v1@17.58,11.216 U1.B9@17.949,10.846 ; v1@17.583,13.615 U1.B6@17.953,13.246 ; v1@17.59,12.81 U1.B7@17.959,12.441 ; v1@17.593,12.018 U1.B8@17.963,11.648 ; U1.B4 18.35,14.465 v1@18.351,14.465 ; U1.B3 18.35,15.265 v1@18.351,15.265
  Bottom Layer w0.203: J1.55 8.505,4.834 8.505,5.507 v1(8.509,5.512) ; 9.609,4.25 9.693,4.333 9.693,4.823 J1.49 ; C34.1 11.462,16.571 12.56,16.571 C26.1 C22.1 ; C19.1 11.951,8.548 C33.1 C35.1 ; C36.1 13.434,7.242 13.434,8.488 C35.1 ; C24.1 C35.1 ; C21.1 15.055,13.385 15.055,12 C25.1 ; J1.S1@19.7,2.17 19.773,2.097 19.773,1.655 19.99,1.438 v1(19.99,1.372) ; J1.S1@19.7,4.83 19.773,4.903 19.773,5.33 19.964,5.521 v1(19.964,5.588) ; C31.1 21.92,17.383 21.92,9.239 C16.1
  Bottom Layer w0.508: U3.2 3.094,16.018 3.094,16.974 3.392,17.272 4.081,17.272 5.115,16.239 5.859,16.239 C7.2 ; U4.2 24.257,15.201 24.93,14.528 C13.1
  other v1: 12.853,0.395 14.153,0.395 15.453,0.395 5.615,0.695 8.215,0.695 9.515,0.695 16.665,0.695 16.99,1.345 7.565,3.295 8.215,3.295 12.765,3.295 5.29,3.945 7.89,3.945 8.54,3.945 9.84,3.945 16.99,3.945 0.415,4.595 2.04,5.245 22.84,5.245 24.79,5.245 0.415,5.895 23.815,5.895 0.415,7.195 21.865,7.195 22.515,7.195 26.415,7.195 0.415,8.495 26.415,8.495 10.447,8.7 2.69,9.145 15.975,9.68 0.415,9.795 15.951,10.425 13.744,11.068 0.415,11.095 12.713,11.083 17.591,11.216 9.552,11.238 10.348,11.241 11.125,11.262 15.975,11.265 17.578,12.018 9.552,12.04 0.415,12.395 17.575,12.814 9.552,12.838 10.338,12.827 17.569,13.615 9.558,13.645 0.415,13.695 4.64,14.345 10.349,14.437 16.708,14.478 18.318,14.496 0.415,14.995 8.751,15.243 9.55,15.245 10.358,15.27 16.76,15.265 18.346,15.265 4.64,15.645 10.327,16.083 0.415,16.295 24.465,16.295 26.415,16.295 3.34,16.945 4.64,16.945 22.84,16.945 0.415,17.595 4.315,17.595 23.165,17.595 26.415,17.595 15.04,18.245 16.34,18.245 19.59,18.245 20.89,18.245 0.415,18.895 3.015,18.895 26.415,18.895 3.34,19.545 15.04,19.545 16.34,19.545 17.64,19.545 18.94,19.545 0.415,20.195 26.415,20.195 6.59,20.845 8.54,20.845 18.29,20.845 0.415,21.495 1.715,21.495 3.015,21.495 4.315,21.495 5.615,21.495 12.115,21.495 26.415,21.495 4.965,22.795 21.865,22.795 22.515,22.795 26.415,22.795 15.69,23.445 16.34,23.445 16.99,23.445 4.965,24.095 16.015,24.095 16.34,24.745 18.29,24.745 5.615,25.395 9.066,25.386 14.065,25.395 14.715,25.395 13.74,26.045 14.39,26.045 5.255,26.646 6.555,26.646 7.855,26.646 9.155,26.646 10.455,26.646 11.755,26.646 13.259,26.645 14.559,26.645 15.859,26.645 17.159,26.645 18.459,26.645 19.759,26.645
NetC41_2: C41.2 U1.C11 | length 2.3
  Top Layer w0.254: U1.C11 17.196,9.217 17.196,8.792 v1(17.631,8.357)
  Bottom Layer w0.508: v1(17.631,8.357) 17.96,8.357 18.516,7.801 C41.2
NetC42_2: C42.2 U1.B5 | length 2.4
  Top Layer w0.254: v1@17.561,14.455 17.561,14.453 U1.B5 U1.B5
  Bottom Layer w0.254: C42.2@16.256,13.973 16.579,13.65 16.629,13.65 16.679,13.65 17.446,14.417 17.471,14.417 17.524,14.47 17.524,14.492 v1@17.561,14.455
  other v1: 17.559,14.445
NetC43_2: C43.2 U1.A5 | length 1.8
  Top Layer w0.254: U1.A5 18.815,14.065 19.204,14.454 19.331,14.454 v1(19.368,14.491)
  Bottom Layer w0.381: v1(19.368,14.491) 19.382,14.504 20.102,14.504 C43.2@20.279,14.682
NetC44_2: C44.2 U1.A3 | length 2.1
  Top Layer w0.254: U1.A3 18.815,15.665 19.025,15.874 19.274,15.874 v1(19.327,15.822)
  Bottom Layer w0.381: C44.2@18.474,16.794 18.734,16.535 18.829,16.535 19.313,16.05 19.313,15.835 v1(19.327,15.822)
NetL1_1: L1.1 U2.3 | length 3.6
  Bottom Layer w0.508: L1.1 11.832,25.025 13.462,25.025 14.359,24.128 U2.3
NetR1_2: R1.2 R2.1 U2.5 | length 4
  Bottom Layer w0.127: R2.1@15.781,20.384 15.994,20.596 15.994,21 16.798,21.804 16.798,21.992 17.033,22.228 U2.5
  Bottom Layer w0.508: R1.2@14.359,20.384 R2.1@15.781,20.384
NetR4_2: R4.2 X1.3 | length 2.2
  Bottom Layer w0.127: R4.2@3.346,6.709 3.346,6.764 3.757,7.176 3.757,7.185 4.156,7.583 ; 4.156,7.585 4.428,7.856 4.428,8.393 X1.3
SCL_1V8: J1.21 U1.G10 | length 5.8
  Top Layer w0.102: 14.346,7.136 14.346,9.641
  Top Layer w0.117: U1.G10 14.346,9.641 ; 14.346,7.136 15.232,6.25 v1@15.232,6.213
  Bottom Layer w0.102: J1.21 v1@15.3,6.054
  Bottom Layer w0.117: v1@15.232,6.213 15.232,6.123 v1@15.3,6.054
  other v1: 15.257,6.162
SDA_1V8: J1.27 U1.H10 | length 6
  Top Layer w0.102: 12.751,7.141 12.751,9.641
  Top Layer w0.117: 12.751,7.141 v1@14.129,5.762 ; 12.751,9.641 U1.H10
  Bottom Layer w0.117: J1.27 14.115,4.845 14.115,5.748 v1@14.129,5.762
  other v1: 14.104,5.762
SDO: J1.18 U1.F10 | length 10.6
  Top Layer w0.102: 15.146,7.206 15.146,9.641
  Top Layer w0.117: U1.F10 15.146,9.641 ; 15.146,7.206 16.158,6.194 16.158,4.66 15.95,4.452 15.95,1.421 15.981,1.39 15.981,1.25 v1(16.045,1.186)
  Bottom Layer w0.117: v1(16.045,1.186) 16.1,1.241 J1.18
TENABLE: J1.30 U1.E11 | length 10
  Top Layer w0.117: U1.E11 15.549,9.174 15.352,8.977 15.352,7.297 16.418,6.232 v1(16.418,3.302)
  Bottom Layer w0.117: J1.30 13.701,2.728 14.021,3.048 16.104,3.048 16.358,3.302 v1(16.418,3.302)
TOUT: J1.32 U1.J11 | length 9.7
  Top Layer w0.117: U1.J11 12.341,9.257 12.341,6.912 13.812,5.442 13.812,1.798 v1(13.31,1.295)
  Bottom Layer w0.117: J1.32 13.305,2.165 13.305,1.3 v1(13.31,1.295)
XCE: J1.23 R3.2 U1.G11 | length 21.8
  Top Layer w0.117: U1.G11 13.949,7.235 14.859,6.324 14.859,5.797 v1@14.874,5.781
  Singal_Int w0.127: v1(1.194,7.899) 1.194,7.911 1.733,8.451 8.491,8.451 9.563,7.379 12.179,7.379 13.31,6.248 13.31,5.678 13.751,5.236 14.355,5.236 v1(14.874,5.756)
  Bottom Layer w0.117: v1(1.194,7.899) 1.194,7.989 1.37,8.165 1.37,8.425 R3.2 ; v1@14.874,5.781 14.887,5.768 14.887,4.843 J1.23
XCLR: J1.15 U1.K10 | length 11.2
  Top Layer w0.102: 11.946,7.042 11.946,9.641
  Top Layer w0.117: U1.K10 11.946,9.641 ; 11.946,7.042 11.946,6.967 13.381,5.532 13.381,3.621 v1(13.435,3.567)
  Bottom Layer w0.117: v1(13.435,3.567) 13.459,3.591 15.072,3.591 15.376,3.895 16.093,3.895 16.51,4.312 16.51,4.82 J1.15
XHS: J1.29 U1.L10 | length 8.5
  Top Layer w0.102: 11.151,6.613 11.151,9.636
  Top Layer w0.117: U1.L10 11.151,9.636 ; 11.151,6.613 12.848,4.915 v1(12.848,3.899)
  Bottom Layer w0.117: v1(12.848,3.899) 13.241,3.899 13.7,4.359 J1.29
XMASTER: J1.19 U1.F11 | length 4.8
  Top Layer w0.117: U1.F11 14.749,7.222 15.667,6.304 15.667,5.751 v1(15.672,5.746)
  Bottom Layer w0.117: v1(15.672,5.746) 15.686,5.732 15.686,4.844 J1.19
XTRIG: J1.31 U1.K11 | length 5.4
  Top Layer w0.117: U1.K11 11.549,6.79 v1@12.573,5.766
  Bottom Layer w0.117: v1@12.573,5.766 13.005,5.766 13.3,5.471 J1.31
  other v1: 12.573,5.756
XVS: J1.25 U1.H11 | length 5
  Top Layer w0.117: U1.H11 13.149,7.552 14.486,6.215 v1@14.486,6.17
  Bottom Layer w0.102: J1.25@14.502,4.832 v1@14.502,6.155
  Bottom Layer w0.117: v1@14.486,6.17 v1@14.502,6.155 ; J1.25 J1.25@14.502,4.832
  other v1: 14.436,6.195
pads on no net: C1.0 C2.0 C3.0 C4.0 C5.0 C6.0 C7.0 C8.0 C9.0 C10.0 C11.0 C12.0 C13.0 C14.0 C15.0 C16.0 C17.0 C18.0 C19.0 C20.0 C21.0 C22.0 C23.0 C24.0 C25.0 C26.0 C27.0 C29.0 C31.0 C32.0 C33.0 C34.0 C35.0 C36.0 C37.0 C39.0 C40.0 C41.0 C42.0 C43.0 C44.0 J1.16 J1.20 J1.22 J1.24 J1.26 J1.28 J1.33 J1.34 J1.35 J1.36 J1.40 J1.41 J1.42 J1.45 J1.47 R1.0 R2.0 R3.0 R4.0 U1.C1 U1.C2 U1.C4 U1.C5 U1.C6 U1.C7 U1.C8 U1.C9 U1.C10 U1.D1 U1.D2 U1.D5 U1.D6 U1.D7 U1.D9 U1.E1 U1.E2 U1.E5 U1.E6 U1.E7 U1.E9 U1.F1 U1.F2 U1.G1 U1.G2 U1.H1 U1.H2 U1.J1 U1.J2 U1.K1 U1.K2 U1.K4 U1.K9 U1.L1 U1.L2 U1.L4 U1.L9 U1.M4 U1.N4 U1.P4 U2.0 U3.0 U3.4 U4.0 U4.4

## Polygon pours and split planes (outlines as drawn)
GND on Bottom Layer "GND_L06_P016" (solid, pour order 16): 3.759,27 25.73,27 cw(c25.73,25.73) 27,25.73 27,1.27 cw(c25.73,1.27) 25.73,0 1.27,0 cw(c1.27,1.27) 0,1.27 0,25.73 cw(c1.27,25.73) 1.27,27
3V3 on Bottom Layer "3V3_L06_P009" (solid, pour order 9): 17.535,3.75 17.535,6.68 22.276,6.68 22.276,0.737 17.535,0.737
3V3 on Bottom Layer "3V3_L06_P000" (solid, pour order 0): 4.826,14.732 4.826,11.557 3.128,11.557 3.128,10.824 1.016,10.824 1.016,12.268 2.819,12.268 2.819,14.732
3V3 on Bottom Layer "3V3_L06_P008" (solid, pour order 8): 23.597,22.098 23.597,19.727 22.352,19.727 22.352,19.126 19.533,19.126 19.533,22.098
1V2 on Bottom Layer "1V2_L06_P011" (solid, pour order 11): 11.714,18.057 14.037,18.057 14.037,19.668 13.128,19.668 13.128,20.977 11.227,20.977 11.227,18.057
2V9 on Bottom Layer "2V9_L06_P015" (solid, pour order 15): 22.955,13.742 25.483,13.742 25.483,10.775 22.955,10.775 22.955,13.741
3V3 on PWR "3V3_L03_P023" (solid, pour order 23): 3.759,27 25.73,27 cw(c25.73,25.73) 27,25.73 27,1.27 cw(c25.73,1.27) 25.73,0 1.27,0 cw(c1.27,1.27) 0,1.27 0,25.73 cw(c1.27,25.73) 1.27,27
1V2 on PWR "1V2_L03_P005" (solid, pour order 5): 11.125,20.117 11.125,17.551 8.001,17.551 8.001,8.001 16.739,8.001 16.739,17.602 14.707,17.602 14.707,20.117
1V8 on PWR "1V8_L03_P010" (solid, pour order 10): 11.125,20.266 11.125,17.551 6.172,17.551 6.172,20.266
2V9 on PWR "2V9_L03_P006" (solid, pour order 6): 16.739,17.602 16.739,7.976 21.869,7.976 21.869,10.236 25.451,10.236 25.451,15.342 21.946,15.342 21.946,17.602
GND on Top Layer "GND_L01_P026" (solid, pour order 26): 3.759,27 25.73,27 cw(c25.73,25.73) 27,25.73 27,1.27 cw(c25.73,1.27) 25.73,0 1.27,0 cw(c1.27,1.27) 0,1.27 0,25.73 cw(c1.27,25.73) 1.27,27
3V3 on Top Layer "3V3_L01_P013" (solid, pour order 13): 20.017,2.878 22.077,2.876 22.077,1.106 20.017,1.106
3V3 on Top Layer "3V3_L01_P014" (solid, pour order 14): 17.738,4.171 17.738,3.068 19.812,3.068 19.812,4.171
3V3 on Top Layer "3V3_L01_P017" (solid, pour order 17): 20.338,4.374 20.338,3.718 22.091,3.718 22.091,6.19 20.344,6.19 20.344,4.89
3V3 on Top Layer "3V3_L01_P025" (solid, pour order 25): 19.583,20.65 19.583,19.126 22.454,19.126 22.454,20.65
3V3 on Top Layer "3V3_L01_P024" (solid, pour order 24): 0.889,12.319 0.889,11.176 2.972,11.176 2.972,12.319
1V2 on Top Layer "1V2_L01_P019" (solid, pour order 19): 11.405,17.907 11.405,19.787 14.249,19.787 14.249,17.907
2V9 on Top Layer "2V9_L01_P018" (solid, pour order 18): 23.19,13.843 25.07,13.843 25.07,10.998 23.19,10.998
GND on GND_B "GND_L05_P020" (solid, pour order 20): 3.759,27 25.73,27 cw(c25.73,25.73) 27,25.73 27,1.27 cw(c25.73,1.27) 25.73,0 1.27,0 cw(c1.27,1.27) 0,1.27 0,25.73 cw(c1.27,25.73) 1.27,27
GND on GND_T "GND_L02_P022" (solid, pour order 22): 3.759,27 25.73,27 cw(c25.73,25.73) 27,25.73 27,1.27 cw(c25.73,1.27) 25.73,0 1.27,0 cw(c1.27,1.27) 0,1.27 0,25.73 cw(c1.27,25.73) 1.27,27
GND on Singal_Int "GND_L04_P027" (solid, pour order 27): 3.759,27 25.73,27 cw(c25.73,25.73) 27,25.73 27,1.27 cw(c25.73,1.27) 25.73,0 1.27,0 cw(c1.27,1.27) 0,1.27 0,25.73 cw(c1.27,25.73) 1.27,27

## Keep-outs
Keep-Out Layer:
  lines w0.02: 0,1.27 ccw(c1.27,1.27) 1.27,0 3.937,0 21.082,0 25.73,0 ccw(c25.73,1.27) 27,1.27 27,5.918 27,23.038 27,25.73 ccw(c25.73,25.73) 25.73,27 23.038,27 1.854,27 1.27,27 ccw(c1.27,25.73) 0,25.73 0,25.146 0,3.937 0,1.27

## Other copper
Top Layer:
  pour cut-out: 8.349,14.839 7.524,14.839 3.962,11.278 3.962,6.248 3.429,5.715 3.429,5.182 3.454,5.182 4.115,4.521 5.309,4.521 5.563,4.267 5.563,3.226 5.232,2.896 5.232,2.438 5.563,2.108 6.731,2.108 6.985,2.362 6.985,3.023 7.907,3.945 8.611,3.945 8.611,2.175 8.306,1.87 8.306,1.168 8.568,0.906 9.64,0.906 10.19,0.356 11.608,0.356 12.09,0.838 12.09,2.007 12.662,2.578 12.662,3.915 12.259,4.318 11.354,4.318 10.82,4.851 10.82,6.426 9.601,7.645 9.144,7.645 8.422,8.368 8.422,14.766
Bottom Layer:
  pour cut-out: 5.258,2.794 5.639,3.175 6.655,3.175 6.998,2.832 6.998,2.043 10.85,2.043 11.142,1.751 11.142,1.16 10.952,0.97 8.216,0.97 7.703,0.457 6.198,0.457 5.258,1.397
  pour cut-out: 3.328,5.787 3.945,5.97 4.291,6.316 4.291,7.102 4.884,7.695 8.46,7.695 9.83,6.325 10.109,6.325 10.363,6.071 10.363,5.156 10.037,4.83 7.427,4.83 7.05,5.207 5.232,5.207 4.623,4.597 3.886,4.597 3.328,5.156

## Silkscreen, mask and mechanical layers (free items; w line width, h text height)
Bottom Overlay:
  text "www.CircuitValley.com" at 21.412,0.499 h0.81
Top Solder:
  text "PhoMX 1V0 2147" at 6.274,25.527 h0.81
  text "CircuitValley.com" at 6.248,24.401 h0.81
Mechanical 15:
  circle w0.127: c13.589,13.462 r12.7
  lines w0.02: -1.5,28.5 28.5,28.5 ; 28.5,-1.5 -1.5,-1.5 ; -1.5,-1.5 -1.5,28.805 28.5,-1.195 28.5,28.5 ; -1.5,-1.5 28.5,28.5
  lines w0.025: 0,1.27 ccw(c1.27,1.27) 1.27,0 25.73,0 ccw(c25.73,1.27) 27,1.27 27,25.73 ccw(c25.73,25.73) 25.73,27 1.27,27 ccw(c1.27,25.73) 0,25.73 0,1.27

## Dimensions
2.5,24.5 to 2.5,2.5 on Mechanical 15
1.854,27 to 1.27,0 on Mechanical 15